# EAGLE board LiPoDisp_ULN (EAGLE 5.07)
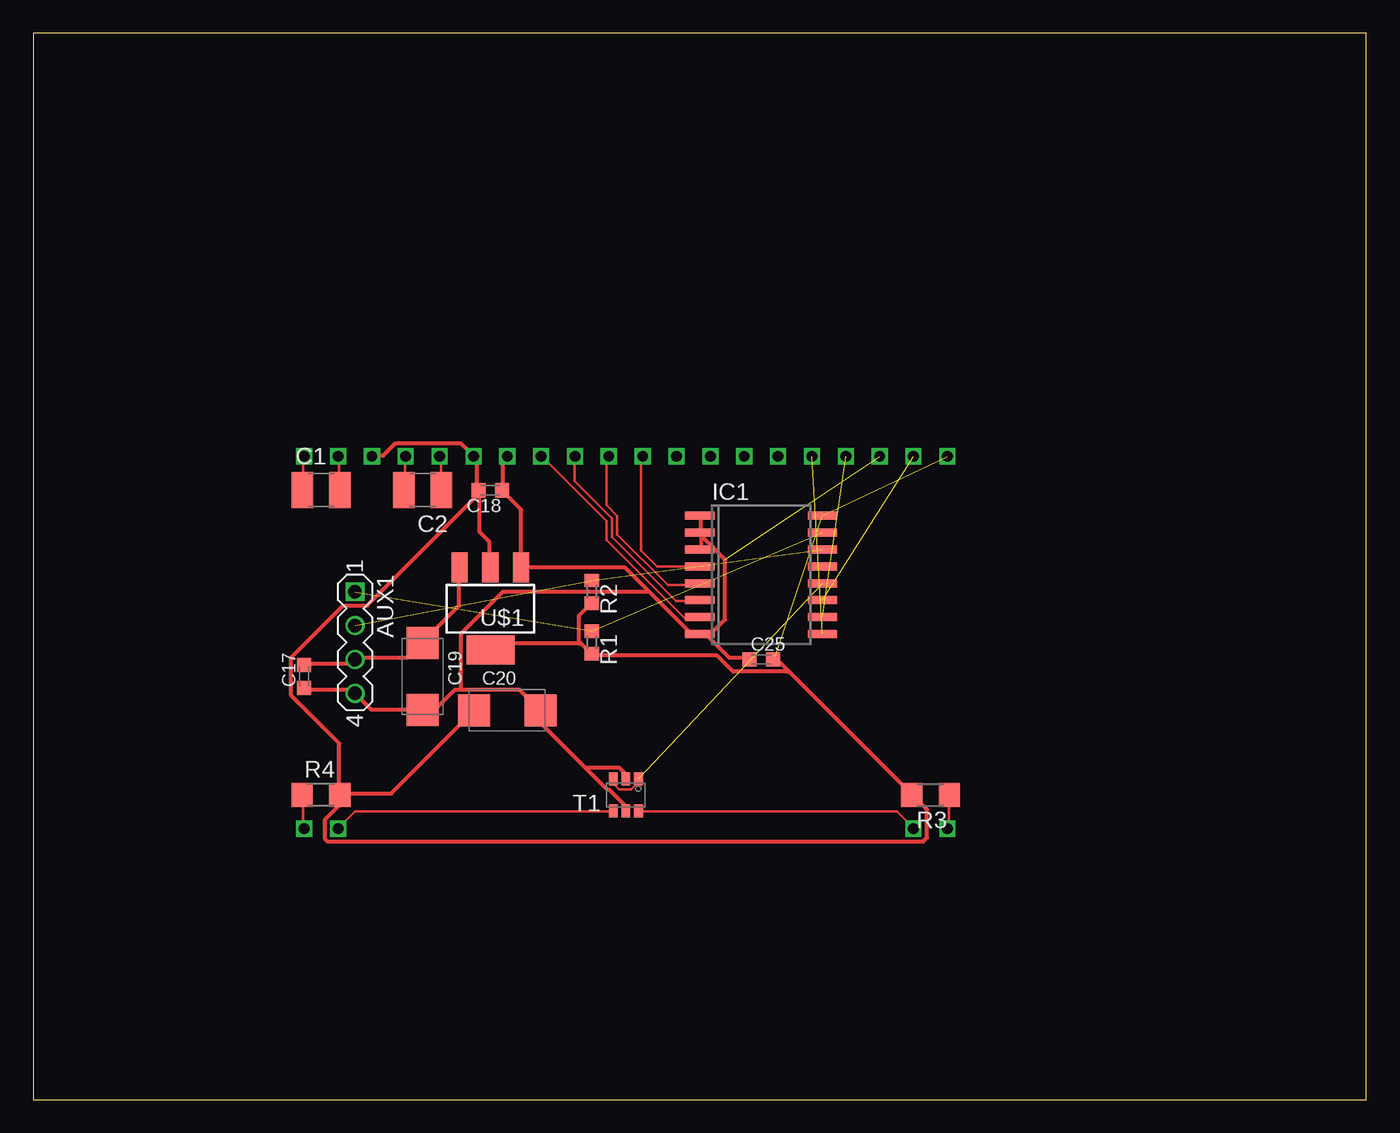
[diagram p0: board, top side]
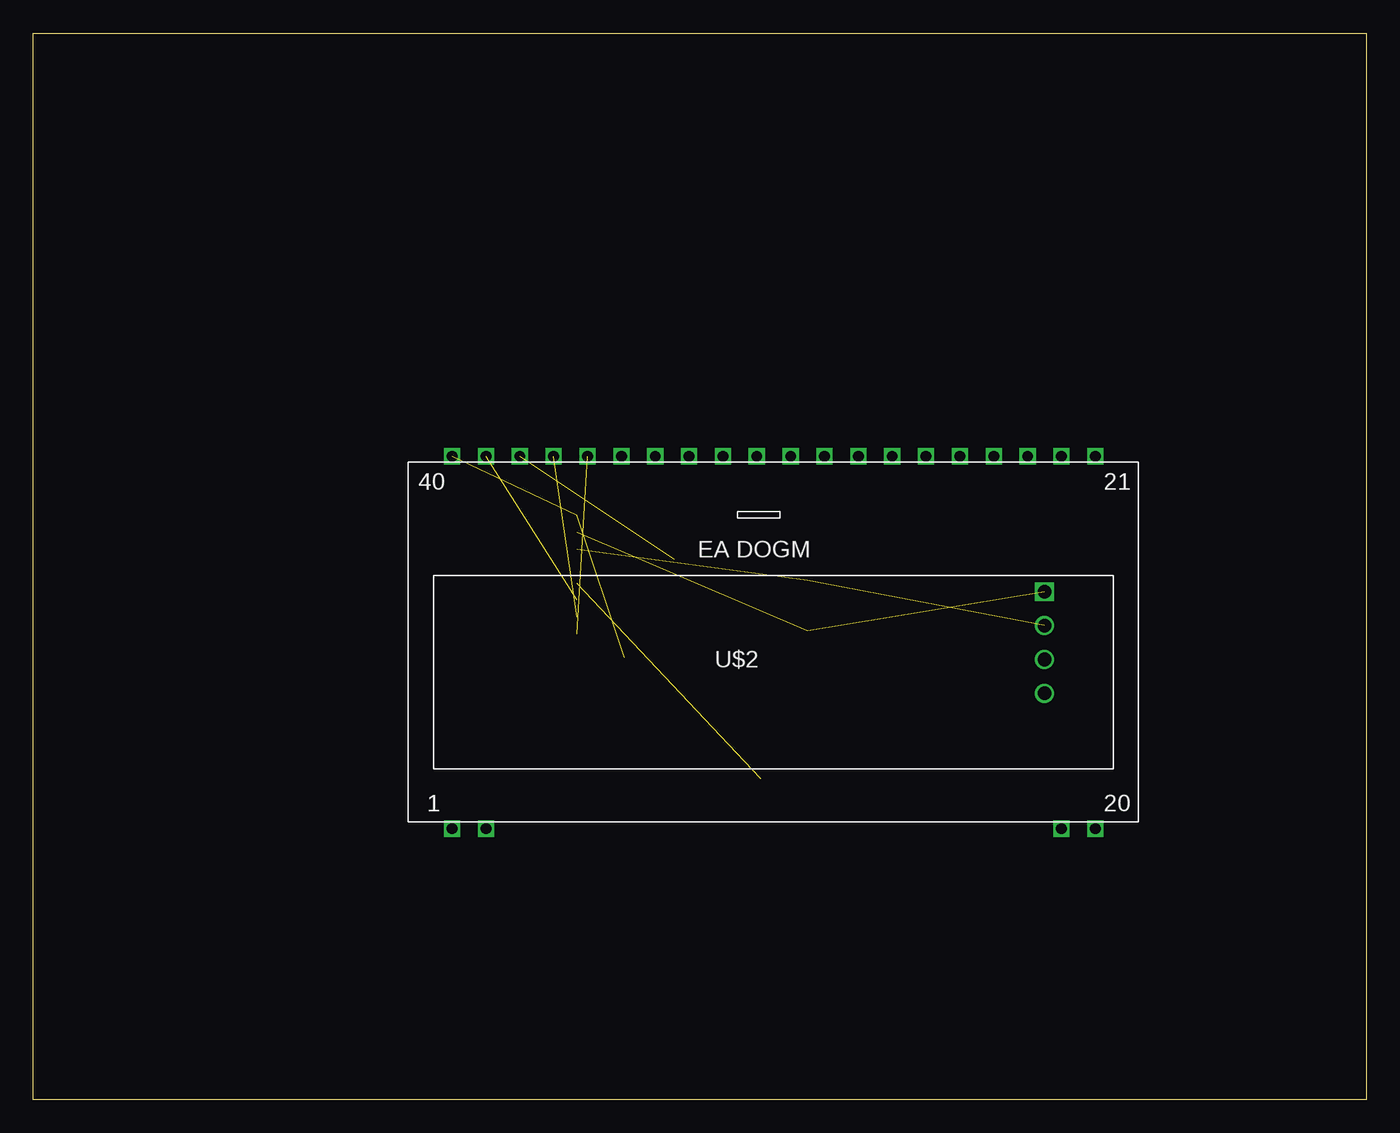
[diagram p1: board, bottom side, seen from below]

Size 100 x 80 mm. Coordinates in mm from the lower left corner, seen from the top.
Outline: 0,0 100,0 100,80 0,80 0,0
Copper layers (1*16): Top 0.035mm / dielectric 1.5mm / Bottom 0.035mm
Design rules "Fischer-LP": minimum track width 0.15mm, minimum drill 0.3mm, track to track 0.15mm, track to pad 0.15mm, pad to pad 0.15mm, via to via 0.15mm, smd to smd 0mil, copper to edge 0.2mm, drill to drill 0.3mm, minimum pad ring 0.2mm, minimum via ring 0.15mm, stop-mask expansion 0.15mm, vias tented up to drill 0.5mm, thermal gap 0.15mm
Net classes: 0 default: width 0.2 mm; 1 Hi-Power: width 0.3 mm; 2 Lo-Power: width 0.3 mm; 3 Iso-bus: clearance 0.6 mm to class 0, clearance 0.6 mm to class 1, clearance 0.6 mm to class 2

## Footprints (pad centres in the part's own frame; a part is rotated, then mirrored left to right if it is on the bottom)
MA04-1 = drill 1.016 square: 1 -3.81,0 | drill 1.016 round: 2 -1.27,0; 3 1.27,0; 4 3.81,0
C1210 = smd 1.6 x 2.7: 1 -1.4,0; 2 1.4,0
C0603K = smd 1.05 x 1.08: 1 -0.875,0; 2 0.875,0
SMC_C = smd 2.4 x 2.4: + -2.5,0; - 2.5,0
SO16W = smd 0.6 x 2.2: 1 -4.445,-4.6; 2 -3.175,-4.6; 3 -1.905,-4.6; 4 -0.635,-4.6; 5 0.635,-4.6; 6 1.905,-4.6; 7 3.175,-4.6; 8 4.445,-4.6; 9 4.445,4.6; 10 3.175,4.6; 11 1.905,4.6; 12 0.635,4.6; 13 -0.635,4.6; 14 -1.905,4.6; 15 -3.175,4.6; 16 -4.445,4.6
R0603 = smd 1 x 1.1: 1 -0.85,0; 2 0.85,0
R1206 = smd 1.6 x 1.803: 1 -1.422,0; 2 1.422,0
SUPERSOT-6 = smd 0.65 x 1: P$1 -0.95,-1.2; P$2 0,-1.2; P$3 0.95,-1.2; P$4 0.95,1.2; P$5 0,1.2; P$6 -0.95,1.2
SOT223 = smd 1.219 x 2.235: LEFT -2.311,-3.099; MID 0,-3.099; RIGHT 2.311,-3.099 | smd 3.6 x 2.2: TAP 0,3.099
EADOG-M = drill 0.813 square: 1 0,0; 2 2.54,0; 19 45.72,0; 20 48.26,0; 21 48.26,27.94; 22 45.72,27.94; 23 43.18,27.94; 24 40.64,27.94; 25 38.1,27.94; 26 35.56,27.94; 27 33.02,27.94; 28 30.48,27.94; 29 27.94,27.94; 30 25.4,27.94; 31 22.86,27.94; 32 20.32,27.94; 33 17.78,27.94; 34 15.24,27.94; 35 12.7,27.94; 36 10.16,27.94; 37 7.62,27.94; 38 5.08,27.94; 39 2.54,27.94; 40 0,27.94

## Placement (x,y rotation side)
AUX1  aux  [MA04-1]  24.13,34.29 270 top
C1  [C1210]  21.59,45.72 0 top
C2  [C1210]  29.21,45.72 180 top
C17  100n  [C0603K]  20.32,31.75 90 top
C18  100n  [C0603K]  34.29,45.72 180 top
C19  100u Tan  [SMC_C]  29.21,31.75 270 top
C20  100u Tan  [SMC_C]  35.56,29.21 0 top
C25  100n  [C0603K]  54.61,33.02 0 top
IC1  PCF8574T  [SO16W]  54.61,39.37 270 top
R1  [R0603]  41.91,34.29 270 top
R2  [R0603]  41.91,38.1 270 top
R3  [R1206]  67.31,22.86 180 top
R4  [R1206]  21.59,22.86 0 top
T1  FDC6401N  [SUPERSOT-6]  44.45,22.86 180 top
U$1  LM1117  [SOT223]  34.29,36.83 180 top
U$2  DOGM  [EADOG-M]  68.58,20.32 0 bottom

## Library data of the parts
AUX1 U$1 = Fabian
C1 C2 C17 C18 C25 R1-R4 = rcl
C19 C20 = rcl; BEST: Farnell 1754066
IC1 = micro-philips
T1 = Fabian; BEST: Farnell 1467966
U$2 = ea

## Nets
+3V3 [Lo-Power]: C18.2 C20.+ C25.2 IC1.16 R1.2 R2.2 R3.2 R4.2 U$1.MID U$1.TAP U$2.23 U$2.26 U$2.40
+12V [Lo-Power]: AUX1.3 C17.2 C19.+ U$1.RIGHT
GND [Lo-Power]: AUX1.4 C17.1 C18.1 C19.- C20.- C25.1 IC1.1 IC1.2 IC1.3 IC1.8 T1.P$2 T1.P$5 U$1.LEFT U$2.27 U$2.38
N$2: IC1.4 U$2.31
N$3: IC1.5 U$2.30
N$4: IC1.6 U$2.29
N$5: IC1.7 U$2.28
N$6: IC1.9 U$2.36
N$7: IC1.10 U$2.37
N$8: IC1.11 U$2.39
N$9: C1.1 U$2.21
N$10: C1.2 U$2.22
N$11: C2.1 U$2.25
N$12: C2.2 U$2.24
N$13: R3.1 U$2.1
N$14: R4.1 U$2.20
N$15: T1.P$6 U$2.2
N$17: T1.P$4 U$2.19
N$18: IC1.12 T1.P$1 T1.P$3
SCL: AUX1.2 IC1.14 R2.1
SDA: AUX1.1 IC1.15 R1.1

## Tracks (layer width: path | path; a pad name or v marks a point on that pad's centre or on a via)
+3V3  (2 unrouted)
  Top 0.3: R4.2 23.1,22.95 26.85,22.95 33,29.1 C20.+ | C18.2 33.3,45.75 33.3,48 33.15,48.15 U$2.26 33,48.3 32.1,49.2 27.15,49.2 26.25,48.3 25.5,48.3 U$2.23 | 33.45,45.45 33.45,45.6 C18.2 | 33.45,45.45 33.45,42.6 34.2,41.85 34.2,40.05 U$1.MID | 33.45,45.45 25.05,37.05 23.25,37.05 19.35,33.15 19.35,30.3 22.95,26.7 22.95,22.95 R4.2 | 33.45,45.45 C18.2 | 41.02,34.27 40.95,34.35 40.95,36.3 41.85,37.2 R2.2 | 41.02,34.27 41.85,33.45 R1.2 42,33.3 51.3,33.3 52.5,32.1 56.55,32.1 56.62,32.17 | 41.02,34.27 40.95,34.2 34.8,34.2 34.35,33.75 U$1.TAP | 56.62,32.17 55.65,33.15 C25.2 | 56.62,32.17 65.85,22.95 R3.2 66,22.8 67.05,21.75 67.05,19.65 66.75,19.35 22.05,19.35 21.9,19.5 21.9,21 22.95,22.05 22.95,22.8 R4.2
+12V
  Top 0.3: C17.2 20.4,32.7 23.7,32.7 24,33 AUX1.3 24.15,33.15 28.05,33.15 29.1,34.2 C19.+ 29.25,34.35 31.95,37.05 31.95,39.9 U$1.RIGHT
GND  (1 unrouted)
  Top 0.3: C17.1 20.4,30.75 23.85,30.75 24,30.6 AUX1.4 24.15,30.45 25.35,29.25 29.1,29.25 C19.- 29.25,29.25 30.15,29.25 31.65,30.75 32.1,30.75 | 41.48,24.82 38.1,28.2 38.1,29.1 C20.- 37.95,29.25 36.45,30.75 32.1,30.75 | 41.48,24.82 43.05,23.25 43.2,23.25 44.4,22.05 44.4,21.75 T1.P$5 | T1.P$2 44.4,24.15 44.4,24.45 43.95,24.9 41.55,24.9 41.48,24.82 | U$2.27 35.55,48.15 35.25,47.85 35.25,45.75 C18.1 35.25,45.6 36.6,44.25 36.6,40.05 U$1.LEFT 36.75,39.9 44.4,39.9 46.12,38.17 | C25.1 53.7,33.15 52.2,33.15 50.55,34.8 50.1,34.8 IC1.8 | 50.1,42.3 50.1,42.45 IC1.2 | 50.1,42.3 50.1,41.4 IC1.3 | IC1.1 50.1,43.8 50.1,42.6 IC1.2 | 50.1,42.3 51.9,40.5 51.9,36 50.7,34.8 IC1.8 | 50.1,42.3 IC1.2 | 46.12,38.17 49.35,34.95 49.95,34.95 IC1.8 | 32.1,30.75 32.1,34.95 35.25,38.1 46.05,38.1 46.12,38.17
N$2
  Top 0.2: U$2.31 45.6,48.2 45.6,41.2 46.8,40 IC1.4
N$3
  Top 0.2: U$2.30 43,48.2 43,44.6 43.8,43.8 43.8,42.4 47.6,38.6 50,38.6 IC1.5
N$4
  Top 0.2: U$2.29 40.6,48.2 40.6,46.4 43.4,43.6 43.4,42.2 48.2,37.4 50,37.4 IC1.6
N$5
  Top 0.2: IC1.7 50,36 49,36 43,42 43,43.4 38.2,48.2 U$2.28
N$6  (1 unrouted)
N$7  (1 unrouted)
N$8  (1 unrouted)
N$9
  Top 0.2: U$2.21 20.25,48.15 20.25,45.75 C1.1
N$10
  Top 0.2: U$2.22 22.95,48.15 22.95,45.75 C1.2
N$11
  Top 0.2: U$2.25 30.6,48.15 30.6,45.75 C2.1
N$12
  Top 0.2: U$2.24 27.9,48.15 27.9,45.75 C2.2
N$13
  Top 0.2: R3.1 68.7,22.8 68.7,20.4 U$2.1
N$14
  Top 0.2: R4.1 20.25,22.8 20.25,20.4 U$2.20
N$15
  Top 0.2: T1.P$6 45.45,21.6 64.8,21.6 66,20.4 U$2.2
N$17
  Top 0.2: T1.P$4 43.35,21.6 24.15,21.6 22.95,20.4 U$2.19
N$18  (1 unrouted)
  Top 0.2: T1.P$3 43.5,24 43.5,23.7 43.95,23.25 44.85,23.25 45.3,23.7 45.3,24 T1.P$1
SCL  (2 unrouted)
SDA  (2 unrouted)